# Altium PCB pcb.PcbDoc (part 1 of 3)
Units mil, origin at the board's own origin, x right, y up, seen from the top; angles counter-clockwise.
Board outline 2027.84 x 963.26 mil, 2 copper layers (Top Layer, Bottom Layer), stack 27.8 mil thick; 72 components, 62 nets, 350 pads, 49 vias.
Unrouted connection lines stored in the file: 14.
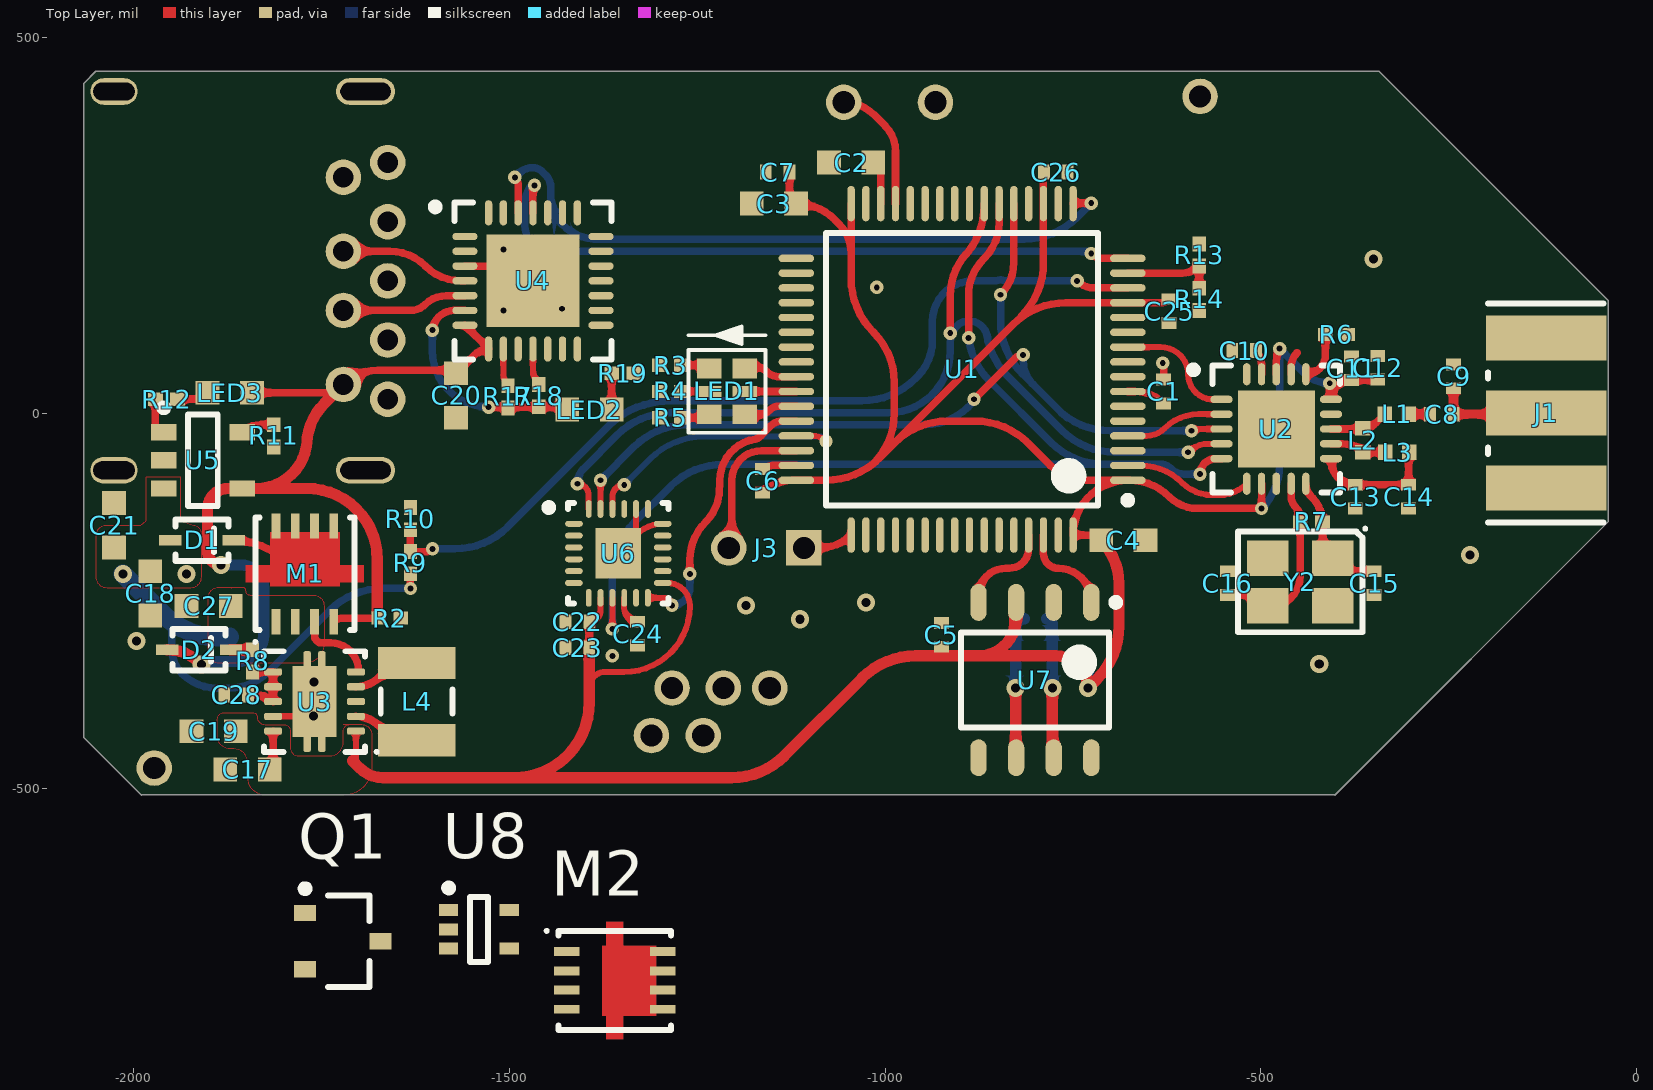
[diagram p0: Top Layer view]
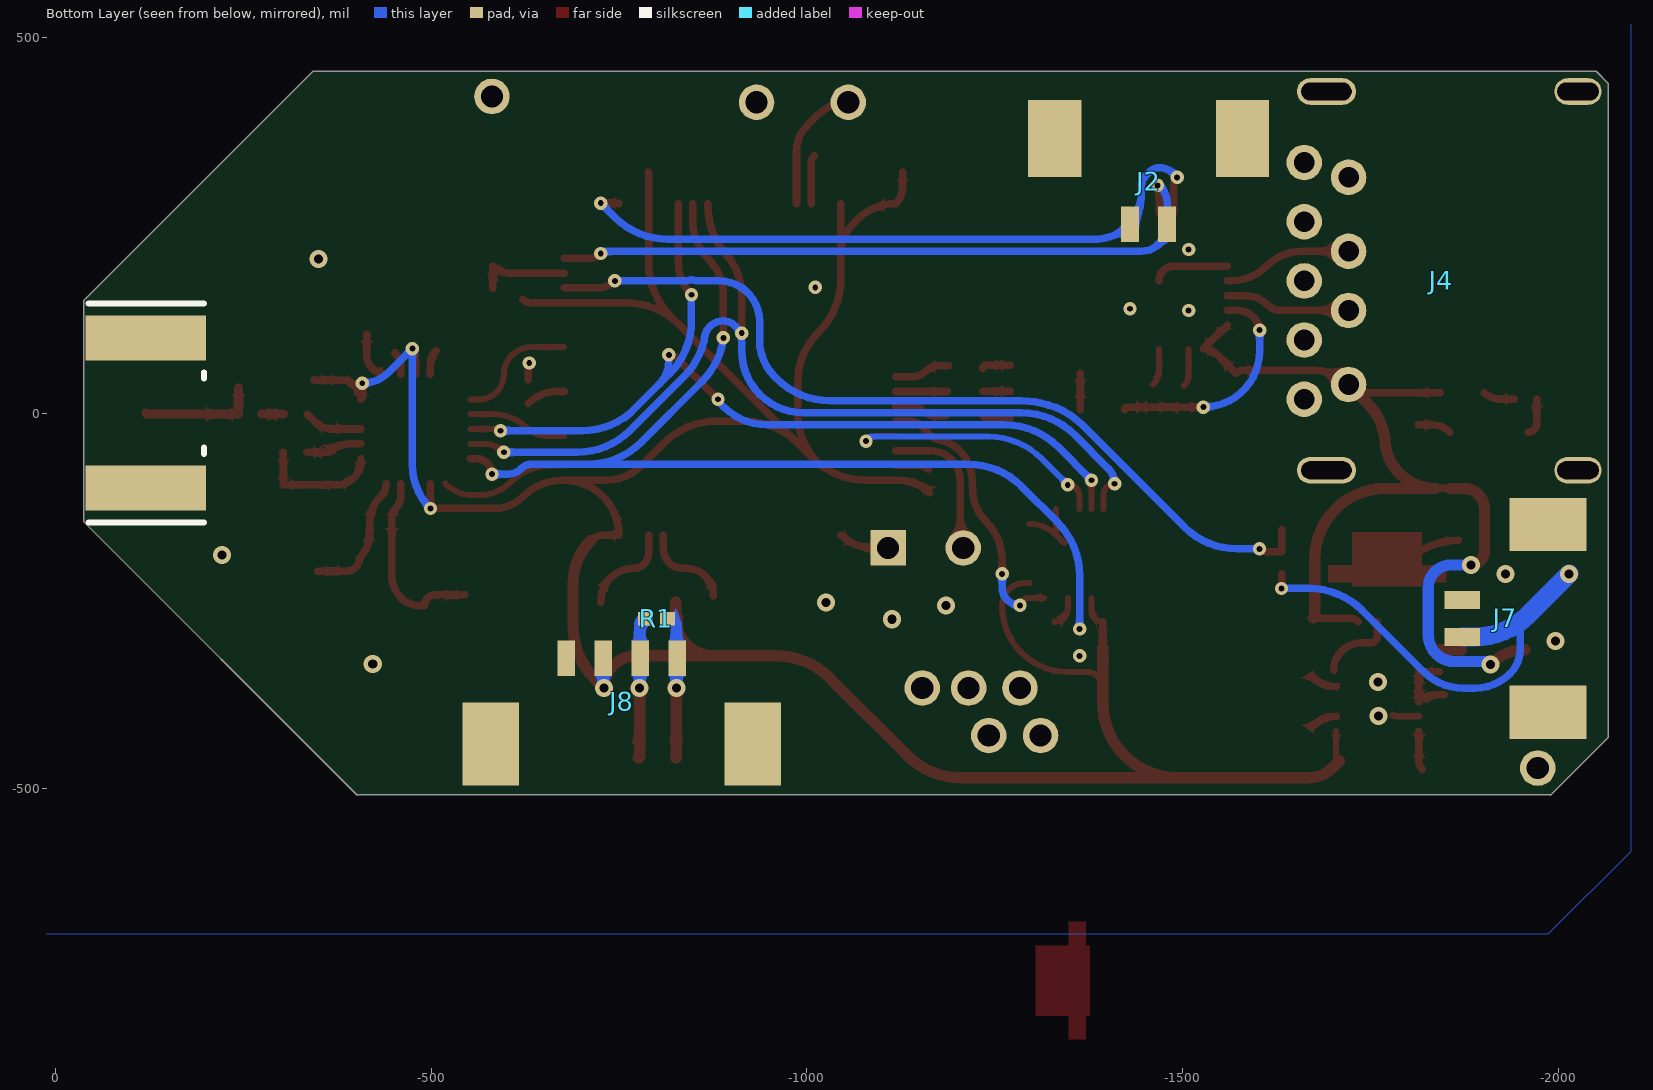
[diagram p1: Bottom Layer view, seen from below]
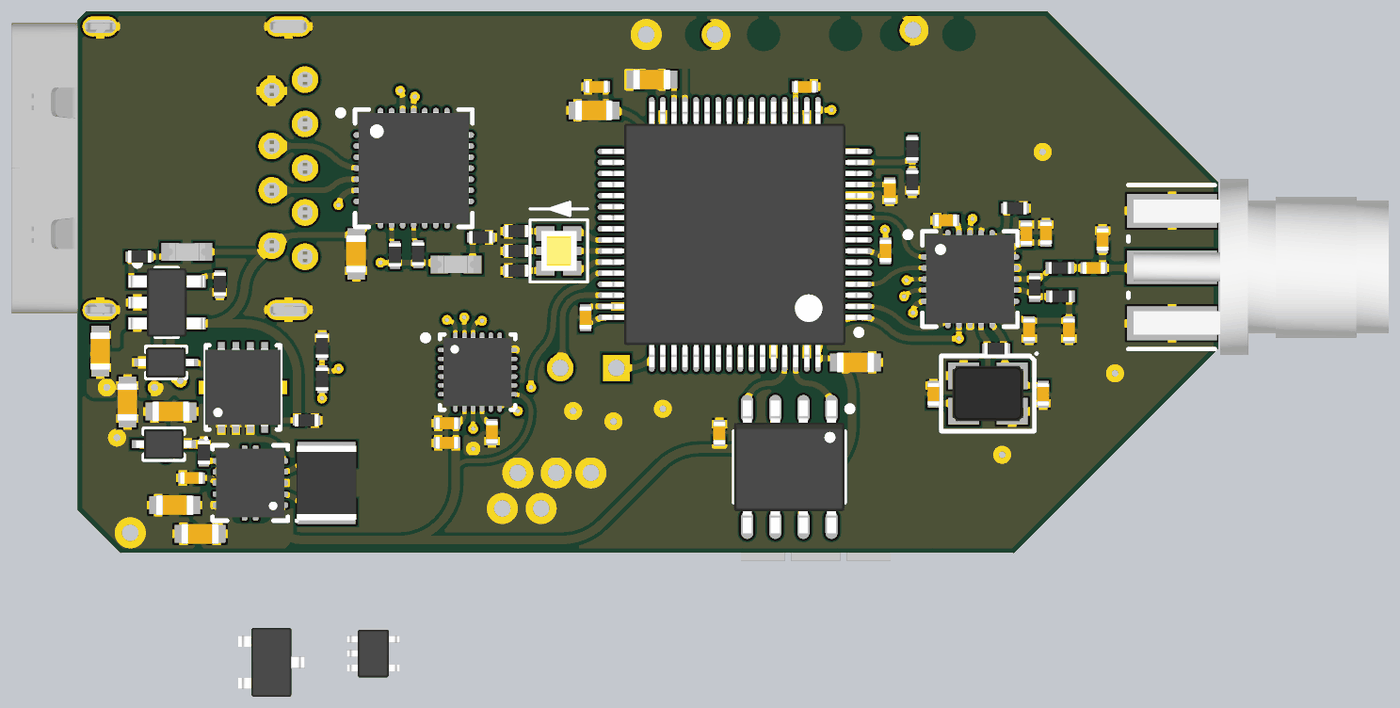
[diagram p2: 3D render of the assembled board from above, using the file's embedded part models]
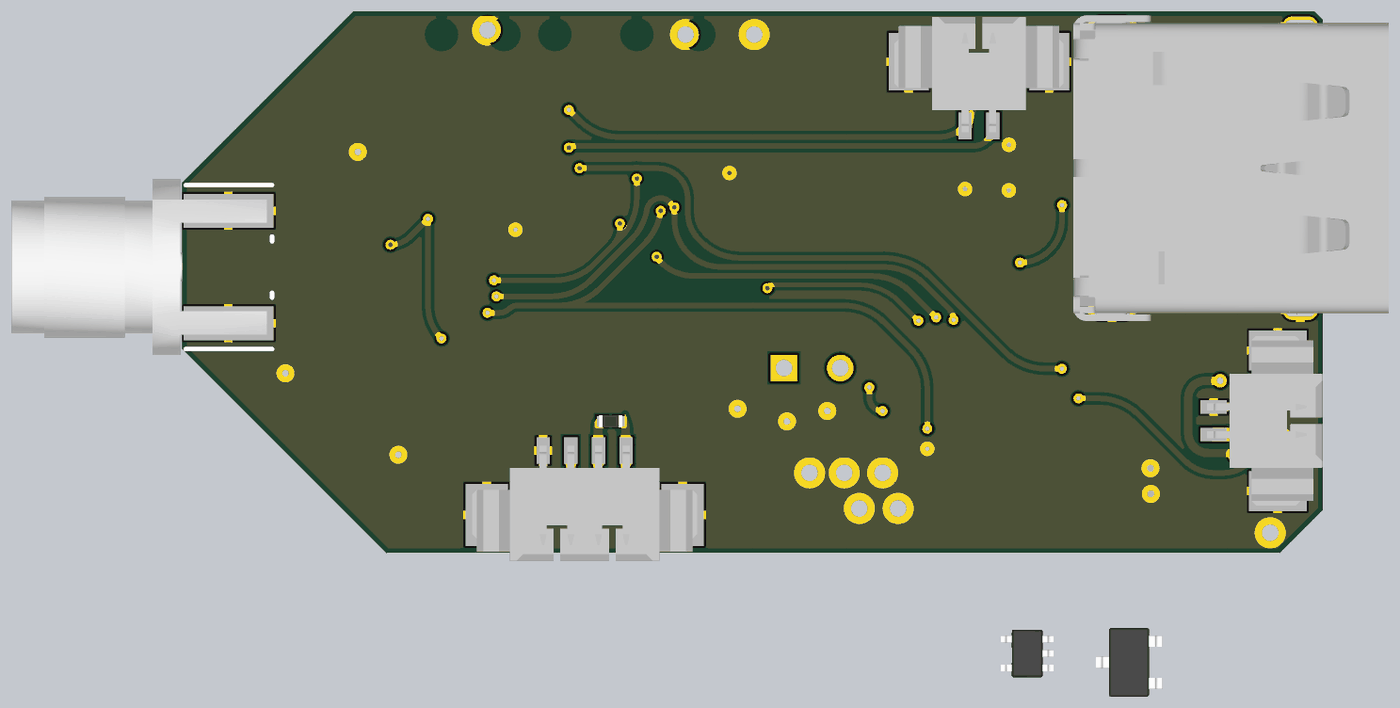
[diagram p3: 3D render of the assembled board from below, using the file's embedded part models]

## Layer stack, top to bottom
Top Solder: solder mask 0.4, Solder Resist, Dk 3.5
Top Layer: signal copper 1.4
Dielectric 1: core 10, FR-4, Dk 4.2
Dielectric 3: prepreg 5, Dk 4.2
Dielectric 2: core 10, Dk 4.2
Bottom Layer: signal copper 1.4
Bottom Solder: solder mask 0.4, Solder Resist, Dk 3.5

## Board outline
-2065.99,-431.9 -2065.99,438.85 -2050.11,454.72 -342.78,454.72 -38.15,150.1 -38.15,-144.87 -401.82,-508.54 -401.82,-507.87 -1989.35,-507.87 -1989.35,-508.54

## Design rules (kind name [scope] priority, off if disabled: settings)
Clearance [All] p1: gap=6 ignorepadtopadclearanceinfootprint=FALSE except(0: Arc-Hole Track-Hole SMDPad-Hole THPad-Hole Via-Hole Fill-Hole Poly-Hole Region-Hole Text-Hole)
MinimumSolderMaskSliver [All] p1 off: minsoldermaskwidth=10
PolygonConnect [All] p1: thpad.connectstyle=Relief thpad.reliefconductorwidth=15 thpad.reliefentries=4 thpad.polygonreliefangle="90 Angle" thpad.airgapwidth=4 smdpad.connectstyle=Relief smdpad.reliefconductorwidth=15 smdpad.reliefentries=4 smdpad.polygonreliefangle="90 Angle" smdpad.airgapwidth=4 via.connectstyle=Direct via.reliefconductorwidth=10 via.reliefentries=4 via.polygonreliefangle="90 Angle" via.airgapwidth=10
RoutingVias [All] p1: holewidth=28 width=50 viastyle="Through Hole" minholewidth=7.87 minwidth=17.72 maxholewidth=28 maxwidth=50
SilkToSilkClearance [All] p1 off: silktosilkclearance=10
SilkToSolderMaskClearance [IsPad] p1 off: minsilkscreentomaskgap=10 clearancetoexposedcopper=TRUE
SolderMaskExpansion [All] p1: expansion=4 istentingtop=FALSE
Width [All] p1: maxlimit=200 minlimit=6 preferedwidth=10 minimp=50.000000 maximp=50.000000 favimp=50.000000
27 further rules are at their usual default settings.

## Classes and differential pairs
component class mpu6500: C22 C23 C24 U6
component class cp2102: J4 LED2 R17 R18 R19 U4
component class power-management: C17 C18 C19 C20 C21 C27 C28 D1 D2 J7 L4 LED3 M1 M2 Q1 R2 R8 R9 R10 R11 R12 R13 R14 U3 U5 U8
component class nrf24l01: C8 C9 C10 C11 C12 C13 C14 C15 C16 J1 L1 L2 L3 R6 R7 U2 Y2
component class uC: C1 C2 C3 C4 C5 C6 C7 C25 C26 J2 J3 J8 LED1 R1 R3 R4 R5 U1 U7

## Components (designator, comment, footprint, x,y, rotation, side; value= is the part's Value field where it differs from the comment)
C1 "100nF" C0402 -629.64,28.64 r90 top
C2 "4.7uF" C0603 -1045.27,333.29 r0 top
C3 "4.7uF" C0603 -1148.1,278.64 r0 top
C4 "4.7uF" C0603 -683.1,-169.47 r180 top
C5 "100nF" C0402 -925.2,-295.28 r90 top
C6 "100nF" C0402 -1163.1,-90.22 r90 top
C7 "100nF" C0402 -1143.1,320.53 r180 top
C8 "1.5pF" C0402 -259.55,-1.57 r0 top
C9 "1.0pF" C0402 -243.8,48.75 r90 top
C10 "33nF" C0402 -522.42,83 r180 top
C11 "10nF" C0402 -379.55,59.5 r90 top
C12 "1nF" C0402 -344.55,60.13 r90 top
C13 "2.2nF" C0402 -374.55,-111.25 r270 top
C14 "4.7pF" C0402 -303.61,-111.25 r270 top
C15 "20pF" C0402 -349.55,-226.25 r270 top
C16 "20pF" C0402 -544.55,-226.25 r90 top
C17 "10uF" C0603 -1848.38,-474.25 r0 top
C18 "10uF" C0603 -1977.63,-239.89 r90 top
C19 "10uF" C0603 -1893.39,-423.22 r0 top
C20 "4.7uF" C0603 -1570.87,23.37 r90 top
C21 "4.7uF" C0603 -2025.91,-149.34 r270 top
C22 "100nF" C0402 -1409.36,-277.69 r180 top
C23 "100nF" C0402 -1409.36,-312.37 r180 top
C24 "100nF" C0402 -1329.36,-293.44 r270 top
C25 "100nF" C0402 -622.16,135.53 r270 top
C26 "100nF" C0402 -773.1,320.53 r0 top
C27 "10uF" C0603 -1900.01,-256.67 r0 top
C28 "100nF" C0402 -1863.51,-375 r180 top
D1 "NSR0530HT1G" SOD-323 -1908.82,-169.49 r0 top
D2 "NSR0530HT1G" SOD-323 -1912.8,-314.95 r0 top
J1 "CONREVSMA003.062" CON-SMA-EDGE062 -120.48,0 r0 top
J2 "53261-0271" 0532610271 -1454.64,251.08 r0 bottom
J3 "Header 2" DUAL_PADS -1208.1,-179.47 r0 top
J4 "0483930003" 0483930003 -1720.79,175.81 r90 bottom
J7 "53261-0271" 0532610271 -1871.82,-273.25 r90 bottom
J8 "SMD connector 4pos" 0532610471 -753.71,-326.3 r180 bottom
L1 "3.9nH 0402" L0402 -319.55,-1.57 r0 top
L2 "8.2nH 0402" L0402 -364.55,-36.25 r90 top
L3 "2.7nH 0402" L0402 -318.61,-52.2 r0 top
L4 "2.2uH" L1210 -1623.38,-383.85 r270 top
LED1 "MSL0402RGBU" MSL0402RGBU -1210.52,28.72 r0 top
LED2 "LED WHITE 0603" LED_0603 -1393.84,4.62 r180 top
LED3 "LED WHITE 0603" LED_0603 -1871.44,26.97 r0 top
M1 "CSD25402Q3A" SON65P330X90-8N -1771.97,-213.91 r90 top
M2 "CSD25402Q3A" SON65P330X90-8N -1359.72,-754.92 r0 top
Q1 "n-mos low power" SOT-23-3 -1721.49,-702.72 r0 top
R1 "120" R0402 -799.95,-273.84 r180 bottom
R2 "10k" R0402 -1659.07,-272.77 r0 top
R3 "470" R0402 -1285.52,63.72 r180 top
R4 "470" R0402 -1285.52,28.72 r180 top
R5 "470" R0402 -1285.52,-6.28 r180 top
R6 "22k" R0402 -399.55,104.58 r180 top
R7 "1M" R0402 -433.07,-144.87 r180 top
R8 "100" R0402 -1841.64,-329.71 r270 top
R9 "10k" R0402 -1631.5,-199.15 r90 top
R10 "10k" R0402 -1631.5,-140.66 r90 top
R11 "2k" R0402 -1813.53,-30.34 r270 top
R12 "470" R0402 -1956.04,18.38 r180 top
R13 "100k" R0402 -582.2,210.25 r270 top
R14 "10k" R0402 -582.2,151.2 r270 top
R17 "10k" R0402 -1501.82,21.52 r90 top
R18 "10k" R0402 -1460.69,23.11 r90 top
R19 "470" R0402 -1349.07,52.9 r0 top
U1 "STM32F730R8T6" QFP-64 -897.63,58.16 r180 top
U2 "NRF24L01" QFN20 -479.55,-21.25 r0 top
U3 "TPS63001DRCR" DRC0010J -1759.18,-383.85 r180 top
U4 "CP2102-GM" QFN28 -1468.55,175.81 r0 top
U5 "MCP73831" SOT-23-5 -1907.57,-62.89 r0 top
U6 "MPU-6500" QFN24 -1354.99,-186.75 r0 top
U7 "TCAN332DR" SOIC8-D0008A -800.73,-355.26 r270 top
U8 "SN74LVC1G80DCK" DCK-SC70-TI -1540.39,-686.97 r0 top
Y2 "16MHz" "NDK NX3225GA" -447.86,-224.76 r180 top

## Footprints (in the part's own frame and the unit in brackets; to place one, negate y for a bottom-side part, rotate by r counter-clockwise, add the part's x,y. Pads: shape width x height; smd on the part's side, far side on the other; paste and mask are expansions set on the pad)
0483930003 [mm]
  round 1.2 hole 0.7: 1(-3.5,0) 2(-1,0) 3(1,0) 4(3.5,0) 5(4,1.5) 6(2,1.5) 7(0,1.5) 8(-2,1.5) 9(-4,1.5)
  oval 0.9x2 hole 0.6 slot 1.7 at 90 deg: 10(-6.4,0.75) 11(6.4,0.75)
  oval 0.9x1.6 hole 0.6 slot 1.4 at 90 deg: 12(-6.4,-7.75) 13(6.4,-7.75)
  body extent -6.9,-11.75 6.9,2.5, height 6.95
0532610271 [mm]
  rect 0.6x1.2 smd: 1(0.625,0) 2(-0.625,0)
  rect 1.8x2.6 smd: 3(3.175,-2.9) 4(-3.175,-2.9)
  body extent -3.82,-4.91 3.83,0.29, height 3.39
0532610471 [mm]
  rect 0.6x1.2 smd: 1(1.875,0) 2(0.625,0) 3(-0.625,0) 4(-1.875,0)
  rect 1.9x2.8 smd: 5(4.425,-2.9) 6(-4.425,-2.9)
  body extent -5.07,-4.97 5.08,0.23, height 3.39
C0402 [mm] "Chip Capacitor, 2-Leads, Body 1.00x0.50mm, IPC Medium Density"
  rect 0.4x0.5 smd: 1(-0.4,0) 2(0.4,0)
  body extent -0.53,-0.28 0.53,0.28, height 0.55
C0603 [mm] "Chip Capacitor, 2-Leads, Body 1.60x0.80mm, IPC Medium Density"
  rect 0.8x0.8 smd: 1(-0.75,0) 2(0.75,0)
  body extent -0.85,-0.45 0.85,0.45, height 0.9
CON-SMA-EDGE062 [mil] "Connector, SMA Female Edge Mount for 0.062\" Thick Board, 5-Lead, Body Dia. 7.9mm"
  rect 160x60 smd: 1(0,0) 2(0,-100) 5(0,100)
  rect 160x60 smd far side: 3(0,-100) 4(0,100)
  silkscreen extent -77,-146 76,146, body extent -68,-156 385,156, height 182
DCK-SC70-TI [mm] "SOT23, 5-Leads, Body 2.00x2.10mm, Pitch 0.65mm, IPC High Density"
  rect 0.65x0.4 smd: 1(-1.025,0.65) 2(-1.025,0) 3(-1.025,-0.65) 4(1.025,-0.65) 5(1.025,0.65)
  silkscreen extent -1.15,-1.1 0.3,1.52, body extent -1.2,-1.07 1.2,1.07, height 1.1
DRC0010J [mm] "SON, 10-Leads, Body 3.00x3.00mm, Pitch 0.50mm, Thermal Pad 2.40x1.49mm, IPC High Density"
  rrect50% 0.6x0.24 smd: 1(-1.4,1) 2(-1.4,0.5) 3(-1.4,0) 4(-1.4,-0.5) 5(-1.4,-1) 6(1.4,-1) 7(1.4,-0.5) 8(1.4,0) 9(1.4,0.5) 10(1.4,1)
  rrect50% 0.25x0.8 smd: 11(-0.25,1.3) 11(-0.25,-1.3) 11(0.25,1.3) 11(0.25,-1.3)
  rect 1.49x2.4 smd: 11(0,0)
  silkscreen extent -2.15,-1.7 1.7,1.75, body extent -1.55,-1.55 1.55,1.55, height 1
DUAL_PADS [mm]
  round 1.2 hole 0.75: 1(0,0)
  rect 1.2x1.2 hole 0.75: 2(2.54,0)
L0402 [mm] "Chip Inductor, 2-Leads, Body 1.00x0.50mm, IPC High Density"
  rect 0.49x0.52 smd: 1(-0.405,0) 2(0.405,0)
  body extent -0.52,-0.28 0.53,0.28, height 0.5
L1210 [mm] "Chip Inductor, 2-Leads, Body 3.20x2.50mm, IPC High Density"
  rect 1.09x2.62 smd: 1(-1.305,0) 2(1.305,0)
  silkscreen extent -0.4,-1.21 0.4,1.21, body extent -1.7,-1.35 1.7,1.35, height 1.2
LED_0603 [mil]
  rect 31.5x31.5 smd: A(29.06,0) C(-30,0)
  body extent -32,-15 32,16, height 28
MSL0402RGBU [mm]
  rect 0.83x0.67 smd: 1(-0.6,0.772) 3(-0.6,-0.772) 4(0.6,-0.772) 6(0.6,0.772)
  rect 0.83x0.37 smd: 2(-0.6,0) 5(0.6,0)
  silkscreen extent -1.3,-1.4 1.3,2.2, body extent -0.8,-0.9 0.8,0.9, height 0.48
"NDK NX3225GA" [mm] "Crystal, 4-Leads, Body 2.50x3.20mm, Pitch 2.20mm, IPC Medium Density"
  rect 1.4x1.2 smd: 1(-1.1,-0.8) 2(1.1,-0.8) 3(1.1,0.8) 4(-1.1,0.8)
  silkscreen extent -2.25,-1.85 2.1,1.7, body extent -1.61,-1.26 1.61,1.26, height 0.75
QFN20 [mm] "QFN, 20-Leads, Body 4.00x4.00mm, Pitch 0.50mm, Thermal Pad 2.60x2.60mm, IPC High Density"
  oval 0.75x0.25 smd: 1(-1.85,1) 2(-1.85,0.5) 3(-1.85,0) 4(-1.85,-0.5) 5(-1.85,-1) 11(1.85,-1) 12(1.85,-0.5) 13(1.85,0) 14(1.85,0.5) 15(1.85,1)
  oval 0.25x0.75 smd: 6(-1,-1.85) 7(-0.5,-1.85) 8(0,-1.85) 9(0.5,-1.85) 10(1,-1.85) 16(1,1.85) 17(0.5,1.85) 18(0,1.85) 19(-0.5,1.85) 20(-1,1.85)
  rect 2.6x2.6 smd: 21(0,0)
  silkscreen extent -2.92,-2.15 2.15,2.15, body extent -2.02,-2.02 2.02,2.02, height 0.95
QFN24 [mm] "QFN, 24-Leads, Body 3.00x3.00mm, Pitch 0.40mm, Thermal Pad 1.54x1.70mm, IPC Medium Density"
  oval 0.6x0.2 smd: 1(-1.5,1) 2(-1.5,0.6) 3(-1.5,0.2) 4(-1.5,-0.2) 5(-1.5,-0.6) 6(-1.5,-1) 13(1.5,-1) 14(1.5,-0.6) 15(1.5,-0.2) 16(1.5,0.2) 17(1.5,0.6) 18(1.5,1)
  oval 0.2x0.6 smd: 7(-1,-1.5) 8(-0.6,-1.5) 9(-0.2,-1.5) 10(0.2,-1.5) 11(0.6,-1.5) 12(1,-1.5) 19(1,1.5) 20(0.6,1.5) 21(0.2,1.5) 22(-0.2,1.5) 23(-0.6,1.5) 24(-1,1.5)
  rect 1.54x1.7 smd: 25(0,0)
  silkscreen extent -2.47,-1.7 1.7,1.7, body extent -1.56,-1.56 1.56,1.56, height 0.9
QFN28 [mm] "QFN, 28-Leads, Body 5.00x5.00mm, Pitch 0.50mm, Thermal Pad 3.13x3.13mm, IPC High Density"
  oval 0.85x0.25 smd: 1(-2.3,1.5) 2(-2.3,1) 3(-2.3,0.5) 4(-2.3,0) 5(-2.3,-0.5) 6(-2.3,-1) 7(-2.3,-1.5) 15(2.3,-1.5) 16(2.3,-1) 17(2.3,-0.5) 18(2.3,0) 19(2.3,0.5) 20(2.3,1) 21(2.3,1.5)
  oval 0.25x0.85 smd: 8(-1.5,-2.3) 9(-1,-2.3) 10(-0.5,-2.3) 11(0,-2.3) 12(0.5,-2.3) 13(1,-2.3) 14(1.5,-2.3) 22(1.5,2.3) 23(1,2.3) 24(0.5,2.3) 25(0,2.3) 26(-0.5,2.3) 27(-1,2.3) 28(-1.5,2.3)
  rect 3.13x3.13 smd: 29(0,0)
  silkscreen extent -3.42,-2.65 2.65,2.65, body extent -2.52,-2.52 2.52,2.52, height 0.9
QFP-64 [mm] "TSQFP, 64-Leads, Body 10.00x10.00mm, Pitch 0.50mm, IPC High Density"
  oval 1.2x0.25 smd: 1(-5.6,3.75) 2(-5.6,3.25) 3(-5.6,2.75) 4(-5.6,2.25) 5(-5.6,1.75) 6(-5.6,1.25) 7(-5.6,0.75) 8(-5.6,0.25) 9(-5.6,-0.25) 10(-5.6,-0.75) 11(-5.6,-1.25) 12(-5.6,-1.75) 13(-5.6,-2.25) 14(-5.6,-2.75) 15(-5.6,-3.25) 16(-5.6,-3.75) 33(5.6,-3.75) 34(5.6,-3.25) 35(5.6,-2.75) 36(5.6,-2.25) 37(5.6,-1.75) 38(5.6,-1.25) 39(5.6,-0.75) 40(5.6,-0.25) 41(5.6,0.25) 42(5.6,0.75) 43(5.6,1.25) 44(5.6,1.75) 45(5.6,2.25) 46(5.6,2.75) 47(5.6,3.25) 48(5.6,3.75)
  oval 0.25x1.2 smd: 17(-3.75,-5.6) 18(-3.25,-5.6) 19(-2.75,-5.6) 20(-2.25,-5.6) 21(-1.75,-5.6) 22(-1.25,-5.6) 23(-0.75,-5.6) 24(-0.25,-5.6) 25(0.25,-5.6) 26(0.75,-5.6) 27(1.25,-5.6) 28(1.75,-5.6) 29(2.25,-5.6) 30(2.75,-5.6) 31(3.25,-5.6) 32(3.75,-5.6) 49(3.75,5.6) 50(3.25,5.6) 51(2.75,5.6) 52(2.25,5.6) 53(1.75,5.6) 54(1.25,5.6) 55(0.75,5.6) 56(0.25,5.6) 57(-0.25,5.6) 58(-0.75,5.6) 59(-1.25,5.6) 60(-1.75,5.6) 61(-2.25,5.6) 62(-2.75,5.6) 63(-3.25,5.6) 64(-3.75,5.6)
  silkscreen extent -5.72,-4.6 4.6,4.6, body extent -6,-6 6,6, height 1.6
R0402 [mm] "Chip Resistor, 2-Leads, Body 1.00x0.50mm, IPC High Density"
  rect 0.5x0.45 smd: 1(-0.375,0) 2(0.375,0)
  body extent -0.52,-0.28 0.53,0.28, height 0.5
SOD-323 [mm] "SODFL, 2-Leads, Body 1.25x2.50mm, IPC High Density"
  rect 0.75x0.35 smd: 1(-1.075,0) 2(1.075,0)
  silkscreen extent -0.9,-0.7 0.9,0.7, body extent -1.25,-0.67 1.25,0.67, height 1
SOIC8-D0008A [mm] "SOIC, 8-Leads, Body 4.91x3.90mm, Pitch 1.27mm, IPC High Density"
  oval 1.25x0.55 smd: 1(-2.625,1.905) 2(-2.625,0.635) 3(-2.625,-0.635) 4(-2.625,-1.905) 5(2.625,-1.905) 6(2.625,-0.635) 7(2.625,0.635) 8(2.625,1.905)
  silkscreen extent -2.75,-2.5 1.6,2.86, body extent -3,-2.5 3,2.5, height 1.75
SON65P330X90-8N [mm] "SON, 8-Leads, Body 3.15x3.30mm, Pitch 0.65mm, IPC Medium Density"
  rect 0.85x0.3 smd: 1(-1.62,-0.325) 1(-1.62,0.325) 1(-1.62,0.975) 2(-1.62,-0.975) 3(1.62,-0.975) 3(1.62,-0.325) 3(1.62,0.325) 3(1.62,0.975)
  Top Layer region: 0.3,-2 0.3,2 -0.3,2 -0.3,-2
  Top Layer region: 1.406,-1.194 1.406,1.176 -0.424,1.176 -0.424,-1.194
  silkscreen extent -2.35,-1.68 1.9,1.72, body extent -1.75,-1.7 1.75,1.7, height 1.1
SOT-23-3 [mm] "SOT23, 3-Leads, Body 2.95x2.80mm, Pitch 0.95mm, IPC High Density"
  rect 0.75x0.55 smd: 1(-1.275,0.95) 2(-1.275,-0.95) 3(1.275,0)
  silkscreen extent -1.4,-1.55 0.9,1.9, body extent -1.5,-1.55 1.5,1.55, height 0.85
SOT-23-5 [mm] "SOT23, 5-Leads, Body 2.90x2.70mm, Pitch 0.95mm, IPC High Density"
  rect 0.85x0.55 smd: 1(-1.325,0.95) 2(-1.325,0) 3(-1.325,-0.95) 4(1.325,-0.95) 5(1.325,0.95)
  silkscreen extent -1.45,-1.55 0.5,1.9, body extent -1.7,-1.55 1.7,1.55, height 1.45

## Part data
C1 C5 C6 C7 C22 C23 C24 C25 C26: library part C0402-100nF, Case/Package=0402, Case Code (Metric)=1005, Dielectric=X7R, Dielectric Material=Ceramic, Insulation Resistance=10GR, Manufacturer=Murata, Manufacturer Part Number 1=GRM155-R7-1C-104K-A88-D, Max Operating Temperature=125°C, Min Operating Temperature=-55°C, Package Quantity=1, Supplier Part Number 1=490-3261-6-ND, Tolerance=10%, Voltage=16V, Capacitance=100nF, Case Code (Imperial)=0402, ComponentLink1Description=http://www.yageo.com/documents/recent/UPY-GP_NP0_16V-to-50V_16.pdf?src-supplier=Digi-Key, ComponentLink1URL=http://www.yageo.com/documents/recent/UPY-GP_NP0_16V-to-50V_16.pdf?src-supplier=Digi-Key, ComponentLink2Description=http://www.yageo.com/documents/recent/UPY-GP_NP0_16V-to-50V_16.pdf?src-supplier=Mouser, ComponentLink2URL=http://www.yageo.com/documents/recent/UPY-GP_NP0_16V-to-50V_16.pdf?src-supplier=Mouser, ComponentLink3Description=http://www.farnell.com/datasheets/4360.pdf?src-supplier=Element14, ComponentLink3URL=http://www.farnell.com/datasheets/4360.pdf?src-supplier=Element14, ComponentLink4Description=https://www.distrelec.biz/Web/Downloads/_t/ds/murata_MLCC_eng_tds.pdf?mime=application%2Fpdf&src-supplier=Distrelec, ComponentLink4URL=https://www.distrelec.biz/Web/Downloads/_t/ds/murata_MLCC_eng_tds.pdf?mime=application%2Fpdf&src-supplier=Distrelec, ComponentLink5Description=http://psearch.murata.com/capacitor/product/GRM155R71C103KA01%23.pdf?src-supplier=Future+Electronics, ComponentLink5URL=http://psearch.murata.com/capacitor/product/GRM155R71C103KA01%23.pdf?src-supplier=Future+Electronics, ComponentLink6Description=https://www.verical.com/server-webapp/html/getDatasheet?partID=85307&src-supplier=Verical, ComponentLink6URL=https://www.verical.com/server-webapp/html/getDatasheet?partID=85307&src-supplier=Verical, ComponentLink7Description=https://www.murata.com/~/media/webrenewal/support/library/catalog/products/capacitor/mlcc/c02e.ashx?la=en-us&src-supplier=Digi-Key, ComponentLink7URL=https://www.murata.com/~/media/webrenewal/support/library/catalog/products/capacitor/mlcc/c02e.ashx?la=en-us&src-supplier=Digi-Key, ComponentLink8Description=https://produktinfo.conrad.com/datenblaetter/450000-474999/454098-da-01-en-VS_KONDENSATOR_0402.pdf?src-supplier=Conrad, ComponentLink8URL=https://produktinfo.conrad.com/datenblaetter/450000-474999/454098-da-01-en-VS_KONDENSATOR_0402.pdf?src-supplier=Conrad, Depth=0.5mm, Description 1="CAP CER 0.1UF 16V X7R 0402", Height=0.5mm, Lead Free="Lead Free", Length=1mm, Material=Ceramic, Mount="Surface Mount", Number of Pins=2, Packaging="Tape and Reel", Pricing="1=0.1, 10=0.034, 100=0.0152, 500=0.01088, 1000=0.00855, 2500=0.00778, 5000=0.00715 (USD)", Radiation Hardening=No, REACH SVHC="No SVHC", Stock=157270509, Supplier 1=Digi-Key, Termination=SMD/SMT, Thickness=0.022inch, Voltage Rating=16V, Voltage Rating (DC)=16V, Width=0.5mm
C2 C3 C4 C20 C21: library part C-4.7uF-0603, "4.7uF 0603", Capacitance=100nF, Case/Package=0402, Case Code (Metric)=1005, Dielectric=Y5V, Manufacturer=Samsung, Manufacturer Part Number=CL05F104ZO5NNNC, Manufacturer Part Number 2=CL10A475MQ8NNNC, Max Operating Temperature=85°C, Min Operating Temperature=-30°C, Package Quantity=4000, Supplier Part Number 1=1276-1004-6-ND, Tolerance=80%, Voltage Rating=16V, Voltage Rating (DC)=6.3V, Case Code (Imperial)=0402, ComponentLink1Description=http://www1.futureelectronics.com/doc/SAMSUNG/CL05F104ZO5NNNC.pdf, ComponentLink1URL=http://www1.futureelectronics.com/doc/SAMSUNG/CL05F104ZO5NNNC.pdf, ComponentLink2Description=https://www.verical.com/server-webapp/html/getDatasheet?partID=358403, ComponentLink2URL=https://www.verical.com/server-webapp/html/getDatasheet?partID=358403, ComponentLink3Description=https://produktinfo.conrad.com/datenblaetter/450000-474999/458504-da-01-en-VS_KONDENSATOR_0402.pdf, ComponentLink3URL=https://produktinfo.conrad.com/datenblaetter/450000-474999/458504-da-01-en-VS_KONDENSATOR_0402.pdf, ComponentLink4Description=http://www.samsungsem.com/kr/support/product-search/mlcc/CL10A475MQ8NNNC.jsp?src-supplier=Digi-Key, ComponentLink4URL=http://www.samsungsem.com/kr/support/product-search/mlcc/CL10A475MQ8NNNC.jsp?src-supplier=Digi-Key, ComponentLink5Description=https://www.verical.com/server-webapp/html/getDatasheet?partID=358407&src-supplier=Verical, ComponentLink5URL=https://www.verical.com/server-webapp/html/getDatasheet?partID=358407&src-supplier=Verical, ComponentLink6Description=http://www1.futureelectronics.com/doc/SAMSUNG%20PASSIVE/CL05B104KQ5NNNC.pdf?src-supplier=Future+Electronics, ComponentLink6URL=http://www1.futureelectronics.com/doc/SAMSUNG%20PASSIVE/CL05B104KQ5NNNC.pdf?src-supplier=Future+Electronics, Contact Plating=Tin, Depth=0.5mm, Description 1="Cap Ceramic 0.1uF 16V Y5V -20% to 80% SMD 0402 85C T/R", Description 2="Cap Ceramic 4.7uF 6.3V X5R 20% SMD 0603 85C Paper T/R", Height=0.5mm, LatestRevisionDate=17-Jul-2002, LatestRevisionNote="Re-released for DXP Platform.", Lead Free="Lead Free", Length=1mm, Material=Ceramic, Mount="Surface Mount", PackageReference=RAD-0.3, Packaging="Tape and Reel", Pricing="1=0.1, 10=0.024, 100=0.0106, 500=0.00756, 1000=0.00595, 2500=0.00541, 5000=0.00497 (USD)", Published=8-Jun-2000, Publisher="Altium Limited", Radiation Hardening=No, Stock=8058560, Supplier 1=Digi-Key, Supplier 2=Digi-Key, Supplier Part Number 2=1276-1907-6-ND, Thickness=0.022inch, Width=0.02inch
C8: library part C0402-1.5pF, ComponentLink1Description=http://www.yageo.com/documents/recent/UPY-GP_NP0_16V-to-50V_16.pdf?src-supplier=Digi-Key, ComponentLink1URL=http://www.yageo.com/documents/recent/UPY-GP_NP0_16V-to-50V_16.pdf?src-supplier=Digi-Key, ComponentLink2Description=http://www.yageo.com/documents/recent/UPY-GP_NP0_16V-to-50V_16.pdf?src-supplier=Mouser, ComponentLink2URL=http://www.yageo.com/documents/recent/UPY-GP_NP0_16V-to-50V_16.pdf?src-supplier=Mouser
C9: library part C0402-1.0pF, ComponentLink1Description=http://www.yageo.com/documents/recent/UPY-GP_NP0_16V-to-50V_16.pdf?src-supplier=Digi-Key, ComponentLink1URL=http://www.yageo.com/documents/recent/UPY-GP_NP0_16V-to-50V_16.pdf?src-supplier=Digi-Key, ComponentLink2Description=http://www.yageo.com/documents/recent/UPY-GP_NP0_16V-to-50V_16.pdf?src-supplier=Mouser, ComponentLink2URL=http://www.yageo.com/documents/recent/UPY-GP_NP0_16V-to-50V_16.pdf?src-supplier=Mouser
C10: library part C0402-33nF, Case/Package=0402, Case Code (Metric)=1005, Dielectric=X7R, Manufacturer=Yageo, Manufacturer Part Number 1=CC0402KRX7R7BB333, Max Operating Temperature=125°C, Min Operating Temperature=-55°C, Package Quantity=1, Supplier Part Number 1=311-1420-6-ND, Tolerance=10%, Voltage Rating=16V, Capacitance=33nF, Case Code (Imperial)=0402, ComponentLink1Description=http://www.yageo.com/documents/recent/UPY-GP_NP0_16V-to-50V_16.pdf?src-supplier=Digi-Key, ComponentLink1URL=http://www.yageo.com/documents/recent/UPY-GP_NP0_16V-to-50V_16.pdf?src-supplier=Digi-Key, ComponentLink2Description=http://www.yageo.com/documents/recent/UPY-GP_NP0_16V-to-50V_16.pdf?src-supplier=Mouser, ComponentLink2URL=http://www.yageo.com/documents/recent/UPY-GP_NP0_16V-to-50V_16.pdf?src-supplier=Mouser, ComponentLink3Description=http://www.farnell.com/datasheets/4360.pdf?src-supplier=Element14, ComponentLink3URL=http://www.farnell.com/datasheets/4360.pdf?src-supplier=Element14, ComponentLink4Description=https://www.distrelec.biz/Web/Downloads/_t/ds/murata_MLCC_eng_tds.pdf?mime=application%2Fpdf&src-supplier=Distrelec, ComponentLink4URL=https://www.distrelec.biz/Web/Downloads/_t/ds/murata_MLCC_eng_tds.pdf?mime=application%2Fpdf&src-supplier=Distrelec, ComponentLink5Description=http://psearch.murata.com/capacitor/product/GRM155R71C103KA01%23.pdf?src-supplier=Future+Electronics, ComponentLink5URL=http://psearch.murata.com/capacitor/product/GRM155R71C103KA01%23.pdf?src-supplier=Future+Electronics, ComponentLink6Description=https://www.verical.com/server-webapp/html/getDatasheet?partID=85307&src-supplier=Verical, ComponentLink6URL=https://www.verical.com/server-webapp/html/getDatasheet?partID=85307&src-supplier=Verical, ComponentLink7Description=https://www.murata.com/~/media/webrenewal/support/library/catalog/products/capacitor/mlcc/c02e.ashx?la=en-us&src-supplier=Digi-Key, ComponentLink7URL=https://www.murata.com/~/media/webrenewal/support/library/catalog/products/capacitor/mlcc/c02e.ashx?la=en-us&src-supplier=Digi-Key, ComponentLink8Description=https://produktinfo.conrad.com/datenblaetter/450000-474999/454098-da-01-en-VS_KONDENSATOR_0402.pdf?src-supplier=Conrad, ComponentLink8URL=https://produktinfo.conrad.com/datenblaetter/450000-474999/454098-da-01-en-VS_KONDENSATOR_0402.pdf?src-supplier=Conrad, ComponentLink9Description=http://www.yageo.com/documents/recent/UPY-GPHC_X7R_6.3V-to-50V_18.pdf?src-supplier=Digi-Key, ComponentLink9URL=http://www.yageo.com/documents/recent/UPY-GPHC_X7R_6.3V-to-50V_18.pdf?src-supplier=Digi-Key, ComponentLink10Description=http://www.mouser.com/ds/2/447/Yageo_UPY-GP_NP0_16V-to-50V_9-358835.pdf?src-supplier=Mouser, ComponentLink10URL=http://www.mouser.com/ds/2/447/Yageo_UPY-GP_NP0_16V-to-50V_9-358835.pdf?src-supplier=Mouser, Composition=Ceramic, Depth=0.5mm, Description 1="CAP CER 0.033UF 16V X7R 0402", Halogen Free="Halogen Free", Height=0.5mm, Lead Free="Lead Free", Length=1mm, Mount="Surface Mount", Packaging="Tape and Reel", Pricing="1=0.1, 10=0.041, 100=0.0182, 500=0.013, 1000=0.01022, 2500=0.00929, 5000=0.00855 (USD)", Radiation Hardening=No, REACH SVHC="No SVHC", Stock=484746, Supplier 1=Digi-Key, Termination=SMD/SMT, Thickness=0.022inch, Voltage Rating (DC)=16V, Width=0.02inch
C11: library part C0402-10nF
C12: library part C0402-1nF
C13: library part C0402-2.2nF, ComponentLink1Description=http://www.yageo.com/documents/recent/UPY-GP_NP0_16V-to-50V_16.pdf?src-supplier=Digi-Key, ComponentLink1URL=http://www.yageo.com/documents/recent/UPY-GP_NP0_16V-to-50V_16.pdf?src-supplier=Digi-Key, ComponentLink2Description=http://www.yageo.com/documents/recent/UPY-GP_NP0_16V-to-50V_16.pdf?src-supplier=Mouser, ComponentLink2URL=http://www.yageo.com/documents/recent/UPY-GP_NP0_16V-to-50V_16.pdf?src-supplier=Mouser
C14: library part C0402-4.7pF, ComponentLink1Description=http://www.yageo.com/documents/recent/UPY-GP_NP0_16V-to-50V_16.pdf?src-supplier=Digi-Key, ComponentLink1URL=http://www.yageo.com/documents/recent/UPY-GP_NP0_16V-to-50V_16.pdf?src-supplier=Digi-Key, ComponentLink2Description=http://www.yageo.com/documents/recent/UPY-GP_NP0_16V-to-50V_16.pdf?src-supplier=Mouser, ComponentLink2URL=http://www.yageo.com/documents/recent/UPY-GP_NP0_16V-to-50V_16.pdf?src-supplier=Mouser
C15 C16: library part C0402-20pF, Case/Package=0402, Case Code (Metric)=1005, Dielectric=C0G, Manufacturer=Yageo, Manufacturer Part Number=CC0402JRNPO9BN200, Max Operating Temperature=125°C, Min Operating Temperature=-55°C, Package Quantity=1, Supplier Part Number 1=311-1417-6-ND, Tolerance=5%, Voltage Rating=50V, Capacitance=20pF, Case Code (Imperial)=0402, ComponentLink1Description=http://www.yageo.com/documents/recent/UPY-GP_NP0_16V-to-50V_16.pdf?src-supplier=Digi-Key, ComponentLink1URL=http://www.yageo.com/documents/recent/UPY-GP_NP0_16V-to-50V_16.pdf?src-supplier=Digi-Key, ComponentLink2Description=http://www.yageo.com/documents/recent/UPY-GP_NP0_16V-to-50V_16.pdf?src-supplier=Mouser, ComponentLink2URL=http://www.yageo.com/documents/recent/UPY-GP_NP0_16V-to-50V_16.pdf?src-supplier=Mouser, Composition=Ceramic, Depth=0.5mm, Description 1="CAP CER 20PF 50V C0G/NPO 0402", Lead Free="Lead Free", Length=1mm, Mount="Surface Mount", Number of Pins=2, Packaging="Tape and Reel", Pricing="1=0.1, 10=0.034, 100=0.0153, 500=0.01096, 1000=0.0086, 2500=0.00782, 5000=0.0072 (USD)", REACH SVHC="No SVHC", Stock=1019426, Supplier 1=Digi-Key, Termination=SMD/SMT, Thickness=0.022inch, Voltage Rating (DC)=50V, Weight=2.3E-05oz, Width=0.02inch
C17 C18 C19 C27: library part C-10.0uF-0603, "10uF 0603", Capacitance=100nF, Case Code (Imperial)=0402, Case Code (Metric)=1005, Dielectric=Y5V, Manufacturer=Samsung, Manufacturer Part Number=CL05F104ZO5NNNC, Manufacturer Part Number 2=CL10A475MQ8NNNC, Max Operating Temperature=85°C, Min Operating Temperature=-30°C, Package Quantity=4000, Supplier Part Number 1=1276-1004-6-ND, Tolerance=80%, Voltage Rating=16V, Voltage Rating (DC)=6.3V, Case/Package=0402, ComponentLink1Description=http://www1.futureelectronics.com/doc/SAMSUNG/CL05F104ZO5NNNC.pdf, ComponentLink1URL=http://www1.futureelectronics.com/doc/SAMSUNG/CL05F104ZO5NNNC.pdf, ComponentLink2Description=https://www.verical.com/server-webapp/html/getDatasheet?partID=358403, ComponentLink2URL=https://www.verical.com/server-webapp/html/getDatasheet?partID=358403, ComponentLink3Description=https://produktinfo.conrad.com/datenblaetter/450000-474999/458504-da-01-en-VS_KONDENSATOR_0402.pdf, ComponentLink3URL=https://produktinfo.conrad.com/datenblaetter/450000-474999/458504-da-01-en-VS_KONDENSATOR_0402.pdf, ComponentLink4Description=http://www.samsungsem.com/kr/support/product-search/mlcc/CL10A475MQ8NNNC.jsp?src-supplier=Digi-Key, ComponentLink4URL=http://www.samsungsem.com/kr/support/product-search/mlcc/CL10A475MQ8NNNC.jsp?src-supplier=Digi-Key, ComponentLink5Description=https://www.verical.com/server-webapp/html/getDatasheet?partID=358407&src-supplier=Verical, ComponentLink5URL=https://www.verical.com/server-webapp/html/getDatasheet?partID=358407&src-supplier=Verical, ComponentLink6Description=http://www1.futureelectronics.com/doc/SAMSUNG%20PASSIVE/CL05B104KQ5NNNC.pdf?src-supplier=Future+Electronics, ComponentLink6URL=http://www1.futureelectronics.com/doc/SAMSUNG%20PASSIVE/CL05B104KQ5NNNC.pdf?src-supplier=Future+Electronics, Contact Plating=Tin, Depth=0.5mm, Description 1="Cap Ceramic 0.1uF 16V Y5V -20% to 80% SMD 0402 85C T/R", Description 2="Cap Ceramic 4.7uF 6.3V X5R 20% SMD 0603 85C Paper T/R", Height=0.5mm, LatestRevisionDate=17-Jul-2002, LatestRevisionNote="Re-released for DXP Platform.", Lead Free="Lead Free", Length=1mm, Material=Ceramic, Mount="Surface Mount", PackageReference=RAD-0.3, Packaging="Tape and Reel", Pricing="1=0.1, 10=0.024, 100=0.0106, 500=0.00756, 1000=0.00595, 2500=0.00541, 5000=0.00497 (USD)", Published=8-Jun-2000, Publisher="Altium Limited", Radiation Hardening=No, Stock=8058560, Supplier 1=Digi-Key, Supplier 2=Digi-Key, Supplier Part Number 2=1276-1907-6-ND, Thickness=0.022inch, Width=0.02inch
C28: library part C0402-100nF, Case Code (Imperial)=0402, Case Code (Metric)=1005, Dielectric=X7R, Dielectric Material=Ceramic, Insulation Resistance=10GR, Manufacturer=Murata, Manufacturer Part Number 1=GRM155-R7-1C-104K-A88-D, Max Operating Temperature=125°C, Min Operating Temperature=-55°C, Package Quantity=1, Supplier Part Number 1=490-3261-6-ND, Tolerance=10%, Voltage=16V, Capacitance=100nF, Case/Package=0402, ComponentLink1Description=http://www.yageo.com/documents/recent/UPY-GP_NP0_16V-to-50V_16.pdf?src-supplier=Digi-Key, ComponentLink1URL=http://www.yageo.com/documents/recent/UPY-GP_NP0_16V-to-50V_16.pdf?src-supplier=Digi-Key, ComponentLink2Description=http://www.yageo.com/documents/recent/UPY-GP_NP0_16V-to-50V_16.pdf?src-supplier=Mouser, ComponentLink2URL=http://www.yageo.com/documents/recent/UPY-GP_NP0_16V-to-50V_16.pdf?src-supplier=Mouser, ComponentLink3Description=http://www.farnell.com/datasheets/4360.pdf?src-supplier=Element14, ComponentLink3URL=http://www.farnell.com/datasheets/4360.pdf?src-supplier=Element14, ComponentLink4Description=https://www.distrelec.biz/Web/Downloads/_t/ds/murata_MLCC_eng_tds.pdf?mime=application%2Fpdf&src-supplier=Distrelec, ComponentLink4URL=https://www.distrelec.biz/Web/Downloads/_t/ds/murata_MLCC_eng_tds.pdf?mime=application%2Fpdf&src-supplier=Distrelec, ComponentLink5Description=http://psearch.murata.com/capacitor/product/GRM155R71C103KA01%23.pdf?src-supplier=Future+Electronics, ComponentLink5URL=http://psearch.murata.com/capacitor/product/GRM155R71C103KA01%23.pdf?src-supplier=Future+Electronics, ComponentLink6Description=https://www.verical.com/server-webapp/html/getDatasheet?partID=85307&src-supplier=Verical, ComponentLink6URL=https://www.verical.com/server-webapp/html/getDatasheet?partID=85307&src-supplier=Verical, ComponentLink7Description=https://www.murata.com/~/media/webrenewal/support/library/catalog/products/capacitor/mlcc/c02e.ashx?la=en-us&src-supplier=Digi-Key, ComponentLink7URL=https://www.murata.com/~/media/webrenewal/support/library/catalog/products/capacitor/mlcc/c02e.ashx?la=en-us&src-supplier=Digi-Key, ComponentLink8Description=https://produktinfo.conrad.com/datenblaetter/450000-474999/454098-da-01-en-VS_KONDENSATOR_0402.pdf?src-supplier=Conrad, ComponentLink8URL=https://produktinfo.conrad.com/datenblaetter/450000-474999/454098-da-01-en-VS_KONDENSATOR_0402.pdf?src-supplier=Conrad, Depth=0.5mm, Description 1="CAP CER 0.1UF 16V X7R 0402", Height=0.5mm, Lead Free="Lead Free", Length=1mm, Material=Ceramic, Mount="Surface Mount", Number of Pins=2, Packaging="Tape and Reel", Pricing="1=0.1, 10=0.034, 100=0.0152, 500=0.01088, 1000=0.00855, 2500=0.00778, 5000=0.00715 (USD)", Radiation Hardening=No, REACH SVHC="No SVHC", Stock=157270509, Supplier 1=Digi-Key, Termination=SMD/SMT, Thickness=0.022inch, Voltage Rating=16V, Voltage Rating (DC)=16V, Width=0.5mm
D1 D2: "DIODE SCHOTTKY 30V 500MA SOD323", Average Rectified Current=500mA, Case/Package=SOD, Forward Voltage=620mV, Manufacturer="ON Semiconductor", Max Operating Temperature=150°C, Max Repetitive Reverse Voltage (Vrrm)=30V, Min Operating Temperature=-55°C, Peak Reverse Current=200uA, Supplier Part Number 1=NSR0530HT1GOSCT-ND, Contact Plating=Tin, Element Configuration=Single, Forward Current=500mA, Lead Free="Lead Free", Manufacturer Part Number=NSR0530HT1G, Max Reverse Voltage (DC)=30V, Mount="Surface Mount", Number of Pins=2, Packaging="Cut Tape", Pricing 1="1=0.16, 10=0.149, 100=0.081, 500=0.04986, 1000=0.03399 (USD)", REACH SVHC="No SVHC", Stock 1=163499, Supplier 1=Digi-Key
J1: "RP-SMA Female Edge Mount Connector for 0.062\" Thick Board", DatasheetVersion="rev1.0, Jun-2006", PackageDescription="SMA Female Edge Mount for Connector 0.062\" Thick Board, Reverse-polarity, 7.9 mm Body Dia.", PackageReference=CON-SMA-EDGE062, PackageVersion="rev1.0, Jun-2006", PartNumber=CONREVSMA003.062, PCB_Layout="Pads complies with manufacturer's recommendation."
J2 J7: "Headers & Wire Housings 1.25MM HDR 2 CKT Right-Angle", Color=Beige, Contact Resistance=20mR, Current Rating=1A, Flammability Rating="UL94 V-0", Insulation Resistance=100MR, Manufacturer=Molex, Max Operating Temperature=85°C, Min Operating Temperature=-40°C, Package Quantity=1000, Supplier Part Number 1=WM7620TR-ND, Voltage Rating=125V, ComponentLink1Description=http://uk.rs-online.com/webdocs/13c4/0900766b813c44b8.pdf, ComponentLink1URL=http://uk.rs-online.com/webdocs/13c4/0900766b813c44b8.pdf, ComponentLink2Description=http://www.molex.com/webdocs/datasheets/pdf/en-us/0532610271_PCB_HEADERS.pdf, ComponentLink2URL=http://www.molex.com/webdocs/datasheets/pdf/en-us/0532610271_PCB_HEADERS.pdf, ComponentLink3Description=http://www.alliedelec.com/m/d/74d14d19c60ab078e4881c4c1bd42ef7.pdf, ComponentLink3URL=http://www.alliedelec.com/m/d/74d14d19c60ab078e4881c4c1bd42ef7.pdf, ComponentLink4Description=http://www.farnell.com/datasheets/2697765.pdf, ComponentLink4URL=http://www.farnell.com/datasheets/2697765.pdf, ComponentLink5Description=http://www.farnell.com/datasheets/2144535.pdf, ComponentLink5URL=http://www.farnell.com/datasheets/2144535.pdf, ComponentLink6Description=http://www.farnell.com/datasheets/1626147.pdf, ComponentLink6URL=http://www.farnell.com/datasheets/1626147.pdf, ComponentLink7Description=http://www.mouser.com/ds/2/276/0532610271_PCB_HEADERS-171053.pdf, ComponentLink7URL=http://www.mouser.com/ds/2/276/0532610271_PCB_HEADERS-171053.pdf, ComponentLink8Description=http://www.farnell.com/datasheets/2038817.pdf, ComponentLink8URL=http://www.farnell.com/datasheets/2038817.pdf, ComponentLink9Description=http://www.jameco.com/Jameco/Products/ProdDS/1932547.pdf, ComponentLink9URL=http://www.jameco.com/Jameco/Products/ProdDS/1932547.pdf, Contact Material=Bronze,Tin, Contact Plating=Tin, Description 1="Headers & Wire Housings 1.25MM HDR 2 CKT Right-Angle", Gender=Male, Glow Wire Compliant=Non-compliant, Housing Material=Thermoplastic, Lead Free="Lead Free", Lead Pitch=1.25mm, Manufacturer Part Number 1=53261-0271, Mount="Surface Mount", Number of Circuits=2, Number of Contacts=2, Number of Positions=2, Number of Rows=1, Orientation="Right Angle", Packaging="Tape and Reel", Pitch=1.25mm, Pricing="1000=0.4904, 2000=0.45975, 3000=0.44443, 5000=0.4291, 10000=0.40765, 25000=0.39845 (USD)", Radiation Hardening=No, REACH SVHC=Unknown, Stock=85000, Supplier 1=Digi-Key, Termination=SMD/SMT, Voltage Rating (AC)=125V, Voltage Rating (DC)=125V, Working Voltage=125V
J3: library part DUAL_PADS
J4: "Conn USB Type A F 9 POS 2mm/2.5mm Solder RA Thru-Hole 9 Terminal 1 Port Embossed T/R", Manufacturer=Molex, Package Quantity=300, Supplier Part Number 1=WM10413CT-ND, Category=Connectors, ComponentLink1Description=https://datasheet.ciiva.com/29660/987651-0181-29660134.pdf?src-supplier=Digi-Key, ComponentLink1URL=https://datasheet.ciiva.com/29660/987651-0181-29660134.pdf?src-supplier=Digi-Key, ComponentLink2Description=https://datasheet.ciiva.com/29660/987651-0181-29660135.pdf?src-supplier=Digi-Key, ComponentLink2URL=https://datasheet.ciiva.com/29660/987651-0181-29660135.pdf?src-supplier=Digi-Key, Connector Type=USB, Gender=Receptacle, Manufacturer Part Number=0483930003, Mount="Through Hole,Horizontal", Number of Contacts=9, Orientation="Right Angle", Packaging="Tape and Reel", Pricing 1="1=1.74000, 10=1.57900, 25=1.48240, 50=1.41780, 100=1.35340 (USD)", Radiation Hardening=No, RoHS=Yes, Stock 1=7788, Supplier 1=Digi-Key, Termination=Solder
J8: library part 0532610471, "Headers & Wire Housings 1.25MM HDR 4 CKT Right-Angle", Color=Beige, Contact Resistance=20mR, Current Rating=1A, Flammability Rating="UL94 V-0", Insulation Resistance=100MR, Manufacturer=Molex, Manufacturer Part Number 1=53261-0471, Max Operating Temperature=85°C, Min Operating Temperature=-40°C, Package Quantity=1000, Supplier Part Number 1=WM7622DKR-ND, Voltage Rating=125V, ComponentLink1Description=http://www.mouser.com/ds/2/276/0532610471_PCB_HEADERS-170942.pdf, ComponentLink1URL=http://www.mouser.com/ds/2/276/0532610471_PCB_HEADERS-170942.pdf, ComponentLink2Description=http://uk.rs-online.com/webdocs/1380/0900766b8138010d.pdf, ComponentLink2URL=http://uk.rs-online.com/webdocs/1380/0900766b8138010d.pdf, ComponentLink3Description=http://www.farnell.com/datasheets/1867384.pdf, ComponentLink3URL=http://www.farnell.com/datasheets/1867384.pdf, ComponentLink4Description=http://www.molex.com/webdocs/datasheets/pdf/en-us/0532610471_PCB_HEADERS.pdf, ComponentLink4URL=http://www.molex.com/webdocs/datasheets/pdf/en-us/0532610471_PCB_HEADERS.pdf, ComponentLink5Description=https://www.alliedelec.com/m/d/74d14d19c60ab078e4881c4c1bd42ef7.pdf, ComponentLink5URL=https://www.alliedelec.com/m/d/74d14d19c60ab078e4881c4c1bd42ef7.pdf, ComponentLink6Description=http://www.jameco.com/Jameco/Products/ProdDS/1932555.pdf, ComponentLink6URL=http://www.jameco.com/Jameco/Products/ProdDS/1932555.pdf, Contact Material=Bronze,Tin, Contact Plating=Tin, Description 1="Headers & Wire Housings 1.25MM HDR 4 CKT Right-Angle", Gender=Male, Glow Wire Compliant=Non-compliant, Housing Material=Thermoplastic, Lead Free="Lead Free", Lead Pitch=1.25mm, Mount="Surface Mount", Number of Circuits=4, Number of Contacts=4, Number of Positions=4, Number of Rows=1, Orientation="Right Angle", Packaging="Tape and Reel", Pitch=1.25mm, Pricing="1=1.24, 10=1.089, 100=0.9397, 500=0.76884 (USD)", Radiation Hardening=No, REACH SVHC=Unknown, Stock=42057, Supplier 1=Digi-Key, Termination=SMD/SMT, Voltage Rating (AC)=125V, Voltage Rating (DC)=125V, Working Voltage=125V
L1: library part L0402-3.9nH
L2: library part L0402-8.2nH, Case/Package=0402, Case Code (Metric)=1005, DC Resistance (DCR)=1.25R, Inductance=0.0082uH, Manufacturer="TE Connectivity", Manufacturer Part Number 1=36401E8N2ATDF, Max Current Rating=220mA, Max Operating Temperature=85°C, Min Operating Temperature=-40°C, Package Quantity=1000, Self Resonant Frequency=5.5GHz, Supplier Part Number 1=A129492DKR-ND, Test Frequency=500MHz, Tolerance=0.2%, Case Code (Imperial)=0402, ComponentLink1Description=http://www.farnell.com/datasheets/1610600.pdf?src-supplier=Element14, ComponentLink1URL=http://www.farnell.com/datasheets/1610600.pdf?src-supplier=Element14, Composition="Thin Film", Depth=0.5mm, Description 1="TE CONNECTIVITY         36401E8N2ATDF            Surface Mount High Frequency Inductor, 3640 Series, 8.2 nH,  0.2nH, 0402 [1005 Metric], 5.5 GHz", ELV=Compliant, Height=0.32mm, Lead/Base Style=SMD/SMT, Length=1mm, Max DC Current=220mA, Mount="Surface Mount", Packaging="Tape and Reel", Pricing="1=0.21, 10=0.188, 100=0.1256, 500=0.10466 (USD)", Q Factor=13, REACH SVHC=Unknown, Shielding=Unshielded, Stock=2935, Supplier 1=Digi-Key, Termination=SMD/SMT, Weight=2.3E-05oz, Width=0.5mm
L3: library part L0402-2.7nH, Case/Package=0402, Case Code (Metric)=1005, Current Rating=300mA, DC Resistance (DCR)=170mR, Inductance=2.7nH, Manufacturer=Murata, Manufacturer Part Number 1=LQG15HN2N7S02D, Max Operating Temperature=125°C, Min Operating Temperature=-55°C, Package Quantity=1, Self Resonant Frequency=6GHz, Supplier Part Number 1=490-1078-6-ND, Temperature Coefficient=10ppm/°C, Test Frequency=100MHz, Case Code (Imperial)=0402, ComponentLink1Description=https://search.murata.co.jp/Ceramy/image/img/P02/partnumberingAT_LQ3E.pdf?src-supplier=Digi-Key, ComponentLink1URL=https://search.murata.co.jp/Ceramy/image/img/P02/partnumberingAT_LQ3E.pdf?src-supplier=Digi-Key, ComponentLink2Description=http://search.murata.co.jp/Ceramy/image/img/P02/JELF243B-0009.pdf?src-supplier=Digi-Key, ComponentLink2URL=http://search.murata.co.jp/Ceramy/image/img/P02/JELF243B-0009.pdf?src-supplier=Digi-Key, ComponentLink3Description=http://www.jameco.com/Jameco/Products/ProdDS/1864290.pdf?src-supplier=Jameco, ComponentLink3URL=http://www.jameco.com/Jameco/Products/ProdDS/1864290.pdf?src-supplier=Jameco, ComponentLink4Description=https://www.verical.com/server-webapp/html/getDatasheet?partID=135996&src-supplier=Verical, ComponentLink4URL=https://www.verical.com/server-webapp/html/getDatasheet?partID=135996&src-supplier=Verical, ComponentLink5Description=http://www.farnell.com/datasheets/66026.pdf?src-supplier=Element14, ComponentLink5URL=http://www.farnell.com/datasheets/66026.pdf?src-supplier=Element14, ComponentLink6Description=http://uk.rs-online.com/webdocs/0f10/0900766b80f10808.pdf?src-supplier=RSComponents, ComponentLink6URL=http://uk.rs-online.com/webdocs/0f10/0900766b80f10808.pdf?src-supplier=RSComponents, ComponentLink7Description=http://search.murata.co.jp/Ceramy/image/img/PDF/ENG/L0075S0083LQG15HN.pdf?src-supplier=Avnet, ComponentLink7URL=http://search.murata.co.jp/Ceramy/image/img/PDF/ENG/L0075S0083LQG15HN.pdf?src-supplier=Avnet, Core Material=Air, DC Current=300mA, Depth=0.55mm, Description 1="FIXED IND 2.7NH 800MA 170 MOHM", Height=0.02inch, Height - Seated (Max)=0.022inch, Lead Free="Lead Free", Length=1mm, Max DC Current=300mA, Military Standard=Not, Mount="Surface Mount", Packaging="Tape and Reel", Pricing="1=0.1, 10=0.061, 100=0.0404, 500=0.03366, 1000=0.02827, 2500=0.02423 (USD)", Q Factor=8, Radiation Hardening=No, REACH SVHC="No SVHC", Shielding=Unshielded, Stock=2142, Supplier 1=Digi-Key, Termination=SMD/SMT, Width=0.02inch
L4: library part DFE322520FD-2R2M=P2, "2.2uH 1210"
LED1: "ROHM         MSL0402RGBU1             LED, Red, Green, Blue, SMD, Rectangular, R 20mA, G 20mA, B 20mA                          New", Color=Blue,Green,Red, Manufacturer=Rohm, Manufacturer Part Number=MSL0402RGBU1, Supplier Part Number 1=MSL0402RGBU1CT-ND, Lead Free="Lead Free", Lens Style=Rectangular, Packaging="Cut Tape", Pricing 1="1=0.7, 10=0.549, 25=0.4576, 100=0.3942, 250=0.352, 500=0.30272, 1000=0.23373 (USD)", REACH SVHC="No SVHC", Stock 1=23725, Supplier 1=Digi-Key
LED2 LED3: library part LED_ESML0603, "LED   Source: http://www.osram.convergy.de   Source: www.luxeon.com   Source: www.kingbright.com", Case/Package=0603, Case Code (Metric)=1608, Color=Green, Forward Current=20mA, Forward Voltage=2V, Lens Color=Colorless,Clear, Manufacturer=Dialight, Manufacturer Part Number=5988070107F, Max Operating Temperature=100°C, Min Operating Temperature=-30°C, Package Quantity=4000, Power Dissipation=60mW, Reverse Voltage=5V, Supplier Part Number 1=350-2035-6-ND, Case Code (Imperial)=0603, ComponentLink1Description=http://www.mouser.com/ds/2/109/SMT_selector_guide-267443.pdf?src-supplier=Mouser, ComponentLink1URL=http://www.mouser.com/ds/2/109/SMT_selector_guide-267443.pdf?src-supplier=Mouser, ComponentLink2Description=http://uk.rs-online.com/webdocs/0ae2/0900766b80ae2975.pdf?src-supplier=RSComponents, ComponentLink2URL=http://uk.rs-online.com/webdocs/0ae2/0900766b80ae2975.pdf?src-supplier=RSComponents, ComponentLink3Description=http://www.farnell.com/datasheets/1720200.pdf?src-supplier=Element14, ComponentLink3URL=http://www.farnell.com/datasheets/1720200.pdf?src-supplier=Element14, ComponentLink4Description=https://media.digikey.com/pdf/Data%20Sheets/Dialight%20PDFs/598_Series_0603_Pkg.pdf?src-supplier=Digi-Key, ComponentLink4URL=https://media.digikey.com/pdf/Data%20Sheets/Dialight%20PDFs/598_Series_0603_Pkg.pdf?src-supplier=Digi-Key, ComponentLink5Description=http://www.farnell.com/datasheets/1484480.pdf?src-supplier=Element14, ComponentLink5URL=http://www.farnell.com/datasheets/1484480.pdf?src-supplier=Element14, ComponentLink6Description=https://www.alliedelec.com/m/d/745256ca487aea7b70ea31e2d673d5bb.pdf?src-supplier=Allied+Electronics, ComponentLink6URL=https://www.alliedelec.com/m/d/745256ca487aea7b70ea31e2d673d5bb.pdf?src-supplier=Allied+Electronics, ComponentLink7Description=http://www.onlinecomponents.com/productFiles/mf-DIA/mdei5980603.pdf?src-supplier=Onlinecomponents.com, ComponentLink7URL=http://www.onlinecomponents.com/productFiles/mf-DIA/mdei5980603.pdf?src-supplier=Onlinecomponents.com, ComponentLink8Description=https://www.verical.com/server-webapp/html/getDatasheet?partID=146438&src-supplier=Verical, ComponentLink8URL=https://www.verical.com/server-webapp/html/getDatasheet?partID=146438&src-supplier=Verical, ComponentLink9Description=http://www.dialight.com/Assets/Brochures_And_Catalogs/Indication/SMT_selector_guide.pdf?src-supplier=Future+Electronics, ComponentLink9URL=http://www.dialight.com/Assets/Brochures_And_Catalogs/Indication/SMT_selector_guide.pdf?src-supplier=Future+Electronics, Depth=0.8mm, Description 1="DIALIGHT - 5988070107F - LED, 0603, GREEN, 20MCD, 566NM", Dominant Wavelength=568nm, Height=0.7mm, Illumination Color=Green, Lead Free="Lead Free", Length=1.6mm, Lens Size=0.8mm, Lens Style=Flat,Rectangular,Diffused,Colorless,Clear, Lens Transparency=Clear, Luminous Intensity=20mcd, Mount="Surface Mount", Number of Elements=1, Number of LEDs=1, Number of Pins=2, Packaging="Tape and Reel", Pricing="1=0.48, 10=0.346, 25=0.2652, 100=0.1731, 250=0.12692, 500=0.1077, 1000=0.08846 (USD)", Radiation Hardening=No, REACH SVHC="No SVHC", SPICEMODEL=NONE, SPICEPREFIX=D, SPICETYPE=diode, Stock=221494, Supplier 1=Digi-Key, Test Current=20mA, Viewing Angle=140°, Wavelength=570nm, Width=0.8mm
Q1: library part NDS351N, Case/Package=TO-236-3, Continuous Drain Current (ID)=1.1A, Drain to Source Breakdown Voltage=30V, Drain to Source Resistance=160mR, Gate to Source Voltage (Vgs)=20V, Input Capacitance=140pF, Manufacturer="ON Semiconductor / Fairchild", Max Operating Temperature=150°C, Max Power Dissipation=460mW, Min Operating Temperature=-55°C, Package Quantity=1, Power Dissipation=500mW, ComponentLink1Description=https://www.verical.com/server-webapp/html/getDatasheet?partID=96049&src-supplier=Verical, ComponentLink1URL=https://www.verical.com/server-webapp/html/getDatasheet?partID=96049&src-supplier=Verical, ComponentLink2Description=https://www.fairchildsemi.com/package-drawings/MA/MA03B.pdf?src-supplier=Digi-Key, ComponentLink2URL=https://www.fairchildsemi.com/package-drawings/MA/MA03B.pdf?src-supplier=Digi-Key, ComponentLink3Description=http://www.fairchildsemi.com/ds/ND/NDS351N.pdf?src-supplier=Avnet+Europe, ComponentLink3URL=http://www.fairchildsemi.com/ds/ND/NDS351N.pdf?src-supplier=Avnet+Europe, ComponentLink4Description=http://www.fairchildsemi.com/ds/ND/NDS351N.pdf?src-supplier=Avnet, ComponentLink4URL=http://www.fairchildsemi.com/ds/ND/NDS351N.pdf?src-supplier=Avnet, Current Rating=1.1A, Drain to Source Voltage (Vdss)=30V, Element Configuration=Single, Fall Time=16ns, Lead Free="Contains Lead", Manufacturer Part Number=NDS351N, Mount="Surface Mount", Number of Elements=1, Number of Pins=3, Packaging="Tape and Reel", Pricing 1="1=0.46, 10=0.383, 50=0.383, 100=0.234, 1000=0.181, 10000=0.144 (USD)", Radiation Hardening=No, Rds On Max=160mR, Rise Time=16ns, Stock 1=2166, Supplier 1=Mouser, Turn-Off Delay Time=26ns, Turn-On Delay Time=9ns, Voltage Rating (DC)=30V, Weight=0.03g